# Altium PCB RobotBoardPcb.PcbDoc (part 2 of 2)
Units mm, origin at the board's own origin, x right, y up, seen from the top; angles counter-clockwise.
Board outline 64 x 85 mm, 4 copper layers (Top Layer, Ground Plane, Power Plane, Bottom Layer), stack 0.844 mm thick; 128 components, 94 nets, 395 pads, 170 vias.
Unrouted connection lines stored in the file: 5.
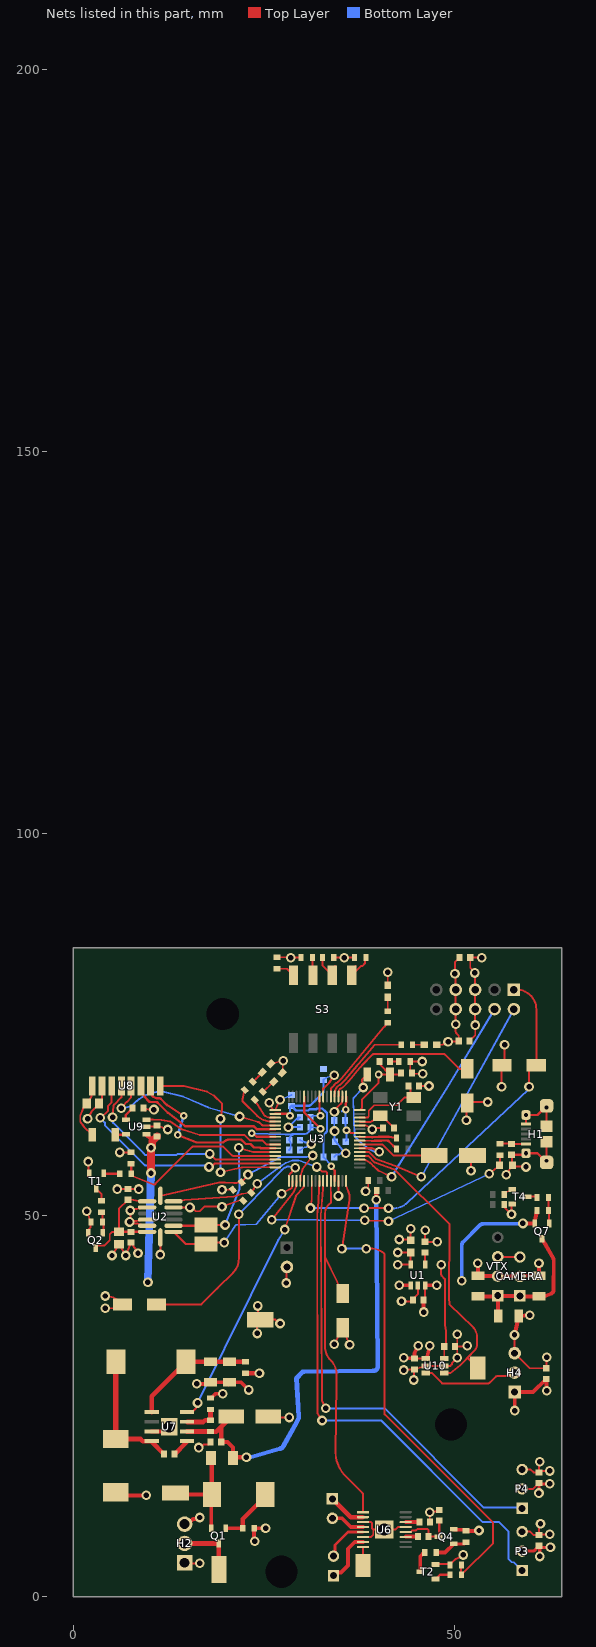
[diagram p4: the nets of this part, all layers, seen from the top]

## Via types
v1: diameter 1.27, hole 0.711, Top Layer to Bottom Layer, 158 vias
v2: diameter 1, hole 0.5, Top Layer to Bottom Layer, 10 vias
v3: diameter 2, hole 1.5, Top Layer to Bottom Layer, 1 vias
v4: diameter 2.2, hole 1.6, Top Layer to Bottom Layer, 1 vias

## Nets (pads, with @x,y where several pads share a name; then routed paths per layer and width w, separated by ;. In a path a pad name is that pad's centre, name@x,y a point inside that pad or via, vN(x,y) a via of type N, cw(c..) or ccw(c..) an arc to the next point about the centre after c; other vN are vias at no path point) (continued)
GND: ?.5 ?.6 C1.1 C2.1 C3.1 C4.1 C5.1 C6.2 C7.2 C8.2 C9.2 C10.2 C11.2 C12.1 C13.1 C14.2 C16.1 C17.1 C18.1 C20.2 C21.1 C22.2 C24.1 C25.2 C26.2 C27.1 C28.2 C29.1 C30.1 C34.1 C35.2 C40.1 C42.1 C43.1 C44.1 C50.1 C51.1 C52.1 C53.1 C55.1 CAMERA.2 D2.1 GND.1 H1.5 H1.6 H2.1 H2.3 H3.2 H4.3 P3.3 P4.3 R7.2 R10.1 R11.1 R12.1 R13.1 R14.2 R16.1 R24.2 R26.2 R34.2 R51.2 R60.2 S1.1 S2.1 S4.1 S5.1 T1.2 T2.2 T4.2 U1.2 U2.2 U2.4 U2.5 U3.2 U3.17 U3.46 U3.60 U6.3 U6.6 U6.13 U6.17 U7.7 U7.EPAD U8.2 U9.2 U10.2 U10.5 VTX.2 | length 240.9
  Top Layer w0.254: v1(1.9,62.6) 2.492,63.622 2.59,63.727 2.977,64.145 C27.1@3.4,64.6 3.4,64.7 3.8,65.1 3.8,66.886 U8.2@3.786,66.9 ; v1(2,57) 2,55.83 T1.2@2.097,55.457 ; v1(4.2,37.8) 5.243,37.8 ccw(c5.243,39.507) S5.1@6.45,38.3 6.094,38.656 ccw(c4.298,36.86) 4.298,39.4 v1(4.2,39.4) ; v1(5.1,44.7) 5.541,45.436 C17.1@6,46.2 6.459,45.436 v1(6.9,44.7) 7.34,45.769 C18.1@7.6,46.4 7.977,45.787 8.5,45.264 v1(8.5,45) ; D2.1@5.6,13.725 D2.1@7.123,13.3 ; v1(5.8,53.4) 6.5,53.4 C16.1@7.2,53.4 ; v1(6.1,58.2) R24.2@7.6,58.2 ; C16.1@7.29,53.255 7.523,53.4 v1(8.6,53.4) ; v1@7.5,49.202 v1(7.5,50.6) 7.694,50.794 8.3,50.794 8.306,50.801 U2.2@9.7,51 U2.2@8.724,51 ; U2.4@8.724,49.4 U2.4@9.7,49.4 8.306,49.201 7.501,49.201 v1(7.4,49.1) 7.593,48.907 8.41,48.907 U2.5@9.7,48.6 ; C42.1@9.473,63.677 C42.1@9.2,64 9.84,63.817 10.584,63.817 v1(10.587,63.814) ; U9.2@9.6,61.55 9.65,61.6 10.9,61.6 C28.2@11,61.7 11.689,61.488 11.783,61.394 12.206,61.394 v1(12.4,61.2) ; U7.EPAD@11.965,21.665 v3(12.6,22.3) ; H2.1@14.6,4.46 14.66,4.4 v1(16.6,4.4) ; H2.3@14.6,9.54 H2.3@15.059,9.54 ; v1@16.406,10.206 v1(16.6,10.4) ; v1(16.447,19.556) 16.722,19.556 17.143,19.977 17.727,19.977 18,20.25 C22.2@18,20.3 ; C25.2@17.8,27.9 C25.2@18,28.1 ; C26.2@20.377,27.677 C26.2@20.5,28.1 ; v1@23.7,7.4 v1(23.8,7.3) ; v1(24.1,34.5) 24.1,35.9 GND.1@24.5,36.3 ; v1(24.2,38.1) 24.2,36.6 GND.1@24.5,36.3 ; C24.1@25.55,23.6 27.073,23.5 v1(28.299,23.5) ; v1(25.7,64.7) 26.077,63.886 ccw(c26.307,63.993) 26.325,63.739 U3.17@26.475,63.75 v1(27.1,65.1) ; R13.1@26.7,83.75 28.45,83.75 v1(28.5,83.7) R12.1@29.85,83.7 ; v1(27.1,35.8) 27,35.8 26.5,36.3 GND.1@24.5,36.3 ; v1(27.9,41.1) 27.95,41.15 27.95,43.15 H3.2@28,43.2 ; R11.1@34.15,83.7 R10.1@36.75,83.7 ; v1(34.2,33.1) 34.547,33.777 S2.1@35.3,35.25 35.893,33.768 v1(36.2,33) ; v1(34.218,63.535) 34.2,63.553 34.2,63.7 35.067,64.553 ccw(c34.75,64.875) 35.201,64.843 U3.2@35.25,65.525 ; v1(34.743,52.507) U3.46@34.75,54.475 ; U3.60@37.525,61.75 38.245,61.75 cw(c38.245,61.496) 38.344,61.73 v1@39.091,61.416 ; U6.6@37.95,7.85 39.012,7.85 39.3,8.138 39.3,8.825 ; U6.3@37.95,9.8 39.012,9.8 39.156,9.656 39.156,8.969 39.3,8.825 ; v1(38.3,53.1) 38.3,53.375 38.65,53.725 R16.1@38.65,54.5 ; v1(39.159,61.206) 39.159,61.191 39.162,61.189 39.176,61.175 39.2,61.2 39.2,61.4 C13.1@40.6,61.4 ; v1(42.7,46.8) 44.1,46.8 C11.2@44.2,46.7 v1(44.2,48.2) ; v1(43,38.7) 44.127,38.7 44.4,38.9 45.15,39.65 U1.2@45.15,40.8 ; v1(43.3,29.7) 44.001,29.75 C30.1@44.7,29.8 ; U6.13@43.55,9.15 43.541,9.141 42.516,9.141 42.2,8.825 v4(40.75,8.825) 39.3,8.825 ; C14.2@44.354,68.5 v1(45.8,68.5) ; C14.2@44.354,68.6 44.15,68.804 R7.2@44.15,70.1 v1(45.7,70.1) ; v1(44.6,28.4) 44.654,29.151 C30.1@44.7,29.8 ; C12.1@45.3,66.9 45.573,66.9 v1(46.6,66.9) ; v1(46.1,48) C40.1@46.1,46.5 v1(47.7,46.5) ; C20.2@46.75,9.8 46.7,10.123 v1(46.7,11.1) 46.871,11.159 cw(c46.954,10.919) 46.954,11.173 47.627,11.173 C21.1@47.95,11.4 ; R26.2@49.35,4.2 50.068,4.918 cw(c50.249,4.739) 50.126,4.962 v1(51.1,5.5) ; v1(50.3,34.4) 50.3,33.1 C29.1@50,32.8 ; v1(51.5,62.4) 51.5,64.55 S4.1@51.6,64.65 51.75,64.8 v1(54.3,64.8) ; v1(51.6,32.9) 51.5,32.8 C29.1@50,32.8 ; C50.1@51.9,72.8 52.66,73.56 v1(52.66,74.877) 52.64,74.897 ?.6@52.64,76.96 ?.5@52.64,79.5 52.62,79.52 52.62,81.68 v1(52.6,81.7) 52.6,81.752 52,82.352 C51.1@52,83.7 v1(53.5,83.7) ; C35.2@52.95,42 C35.2@53,42.05 C35.2@53.05,42 ; VTX.2@55.6,42 VTX.2@55.62,41.98 ; v1(56.1,66.8) 56.1,69.55 cw(c56.15,69.55) S1.1@56.15,69.6 ccw(c56.15,69.95) 56.5,69.95 v1(56.5,72.3) ; R51.2@56.45,51.4 56.45,51.05 v1(57.4,50.1) 57.4,51.35 T4.2@57.5,51.45 ; v1(56.714,55.275) 57.227,56.127 R60.2@57.55,56.5 ; C44.1@57.4,57.9 57.469,57.251 57.47,57.249 R60.2@57.55,56.5 ; v1(57.8,34.3) 57.809,32.021 ccw(c58.063,32.023) 57.81,32 H4.3@57.818,31.908 59.787,29.939 C55.1@61.951,29.939 62,30.212 v1(62,31.4) ; CAMERA.2@58.48,41.98 CAMERA.2@58.5,41.96 CAMERA.2@58.59,42.05 ; P3.3@58.8,8.54 59.86,8.54 60.3,8.1 C52.1@61,8.1 61.1,8.2 v1(62.4,8.2) ; P4.3@58.8,16.68 59.92,16.68 60.3,16.3 C53.1@61,16.3 ; 59.149,36.855 v1(59.8,36.9) ; v1(59.3,56.3) 58.7,56.369 ccw(c58.671,56.116) 58.671,56.37 57.873,56.37 R60.2@57.55,56.5 ; H1.5@59.3,61.9 H1.6@59.3,63.1 ; C52.1@61,8.2 61,9.125 61.2,9.325 v1(61.2,9.6) ; C34.1@61,42.05 C34.1@61.15,41.9 ; v1(61.1,17.7) 61,17.6 C53.1@61,16.3 ; v1(62.4,16.5) 61.2,16.5 C53.1@61,16.3 ; C30.1@44.7,29.8 45.389,30.007 45.411,30.013 U10.2@46.2,30.25 U10.5@48.6,30.25 49.4,30.25 49.609,30.459 49.609,30.609 v1(50.3,31.3) 50.3,32.5 C29.1@50,32.8
  Top Layer w0.3: T2.2@47.45,4.246 47.496,4.246 47.55,4.3 49.25,4.3 R26.2@49.35,4.2 ; C44.1@57.4,57.9 59.1,57.9 H1.6@59.3,58.1 60.8,58.1 61.8,57.1 H1.6@62,57.1 H1.6@62,59.6 ; H1.6@59.3,63.1 60.8,63.1 61.8,64.1 H1.6@62,64.1 H1.6@62,61.6
  Top Layer w0.5: D2.1@7.123,13.3 v1(9.6,13.3) ; U7.7@10.289,21.665 U7.EPAD@11.965,21.665 ; H2.3@15.059,9.54 15.725,10.206 v1@16.406,10.206 ; v1(16.2,27.9) C25.2@17.8,27.9 ; R34.2@18,26.05 18.1,26.15 18.2,26.15 18.65,26.6 v1(19.6,26.6) ; C25.2@18,28.1 C26.2@20.5,28.1 22,28.1 v1(23,27.1) ; v1@23.7,7.4 R14.2@23.7,9 v1(25.2,9) ; C35.2@53,42.05 v1(53,43.7) ; C35.2@53.05,42 VTX.2@55.6,42 ; VTX.2@55.62,41.98 CAMERA.2@58.48,41.98 ; v1(57.8,34.3) 58.109,35.706 C43.1@58.35,36.8 59.149,36.855 ; CAMERA.2@58.59,42.05 C34.1@61,42.05 v1(61,43.7)
  Bottom Layer w0.254: v1(27.1,65.1) 27.918,65.427 C2.1@28.6,65.7 ; C6.2@29.427,62.477 C6.2@29.7,62.8 29.5,62.8 v1(28.2,61.5) C7.2@29.7,61.5 ; C9.2@29.7,58.5 30.313,58.877 30.502,58.877 30.925,59.3 v1(31.2,59.3) 31.006,59.494 30.395,59.494 30.333,59.556 C8.2@29.7,59.8 ; C3.1@34.2,57.6 34.2,57.65 34.473,57.923 34.848,57.923 35.225,58.3 v1@35.5,58.3 ; v1@34.2,61 C5.1@34.2,62.4 34.218,62.723 v1(34.218,63.535) ; v1(34.235,61) 34.235,59.923 34.3,59.7 34.573,59.377 35.262,58.578 35.7,58.14 v1(35.7,58.1)
  other v1: 35.5,83.7
"H-BRIDGE FAULT": "H-BRIDGE FAULT.1" U6.8 | length 2.4
  Top Layer w0.3: 37.95,4.1 U6.8@37.95,6.55
H-BRIDGE-ENABLE: R25.1 R26.1 U3.48 | length 65.7
  Top Layer w0.254: v1(35.2,45.6) 36.182,52.021 ccw(c35.931,52.06) 36.183,52.028 ccw(c34.173,52.287) 36.063,53.017 ; U3.48@35.75,54.475 35.75,53.878 ccw(c36.004,53.878) 35.767,53.787 36.063,53.018 ; v1(38.4,45.6) 38.66,45.627 cw(c38.94,42.903) 40.7,45 cw(c40.517,44.784) 40.8,44.784 40.8,23.9 55,9.7 55,7.05 R25.1@50.85,2.9 50.8,2.95 50.8,4.15 R26.1@50.85,4.2
  Bottom Layer w0.254: v1(35.2,45.6) v1(38.4,45.6)
I2C_SCL: R8.1 U2.14 U3.36 | length 25.1
  Top Layer w0.254: U2.14@11.425,52.525 11.952,52.612 19.102,54.262 19.898,54.262 21.04,54.215 21.301,54.175 21.427,54.175 R8.1@22.075,54.282 22.457,54.753 v1(22.9,55.3) ; U3.36@29.75,54.475 29.799,55.157 cw(c30.25,55.125) 29.817,55.256 30.021,55.928 ccw(c29.1,56.207) 30.034,55.978 cw(c30.281,55.918) 30.08,56.073 v1(31.4,57.8)
  Bottom Layer w0.254: v1(22.9,55.3) 27.164,57.6 28.432,57.609 28.513,57.623 30.535,57.623 v1(31.4,57.8)
I2C_SDA: R9.1 U2.13 U3.43 | length 23.3
  Top Layer w0.254: U2.13@13.15,51.8 14.567,51.957 21.066,52.421 22.064,52.762 22.636,52.853 R9.1@23.33,52.93 23.664,53.438 v1(24.1,54.1) ; v1(31.9,56.3) 31.961,56.3 32.556,55.705 33.056,55.705 33.25,55.51 U3.43@33.25,54.475
  Bottom Layer w0.254: v1(24.1,54.1) 27.269,56.45 cw(c28.654,54.583) 27.389,56.534 27.787,56.792 28.702,57.169 29.498,57.169 v1(31.9,56.3)
"IMU ENABLE": R23.1 R24.1 U3.29 | length 23.5
  Top Layer w0.254: R23.1@7.6,55.4 7.823,55.077 10.508,54.018 ccw(c10.602,54.254) 10.781,54.074 15.632,58.926 cw(c15.812,58.746) 15.812,59 19.495,59 cw(c19.495,58.746) 19.675,58.925 20.776,57.824 ccw(c20.955,58.004) 20.955,57.75 U3.29@26.475,57.75 ; R24.1@7.6,56.7 R24.1@7.923,56.9
  Top Layer w0.3: R23.1@7.6,55.4 R24.1@7.6,56.7
"IMU INT1": INT1.1 U2.8 U3.34 | length 20.4
  Top Layer w0.254: INT1.1@17.4,46.2 18.773,46.4 v1(19.8,46.4) ; v1(27.3,52.8) 28.394,53.394 cw(c28.516,53.171) 28.419,53.406 ; 28.42,53.406 ccw(c28.25,53.825) 28.701,53.793 U3.34@28.75,54.475
  Top Layer w0.3: U2.8@13.15,47.8 14.75,46.2 INT1.1@17.4,46.2
  Bottom Layer w0.254: v1(19.8,46.4) 21.228,48.59 21.321,48.683 23.985,48.795 v1(27.3,52.8)
"IMU INT2": INT2.1 U2.9 U3.28 | length 22.6
  Top Layer w0.254: INT2.1@17.4,48.7 v1(19.9,48.7) ; v1(21.7,58.8) 23.567,58.28 cw(c23.5,58.035) 23.597,58.269 ccw(c23.694,58.504) 23.694,58.25 U3.28@26.475,58.25
  Top Layer w0.3: U2.9@13.15,48.6 17.3,48.6 INT2.1@17.4,48.7
  Bottom Layer w0.254: v1@20.257,49.057 v1(19.9,48.7) 21.798,53.398 21.799,53.452 v1(21.7,58.8)
LED_strip: H4.2 U10.3 | length 12.7
  Top Layer w0.254: U10.3@46.2,29.3 47,29.3 48.327,27.973 54.368,27.973 ccw(c54.368,28.227) 54.547,28.047 55.326,28.826 cw(c55.505,28.646) 55.505,28.9 57.245,28.9 ccw(c57.245,29.154) 57.424,28.974 H4.2@57.818,29.368
LED_Strip_Leveled: LED.1 U3.52 U10.4 | length 40.3
  Top Layer w0.254: U3.52@37.525,57.75 38.629,57.75 39.504,56.875 42.098,55.962 49.3,48.8 49.249,39.032 49.26,38.431 ccw(c49.514,38.436) 49.338,38.253 52.332,35.368 cw(c52.156,35.184) 52.335,35.365 52.336,35.364 cw(c50.969,34) 52.9,34 52.9,33.024 cw(c51.876,33.024) 52.6,32.3 51.642,31.299 ; U10.4@48.6,29.3 49.4,29.3 50.698,30.338 51.262,30.902 51.642,31.299 ; LED.1@53,30 51.819,31.13 51.642,31.299
MISO: U3.27 U8.7 | length 22.5
  Top Layer w0.3: U8.7@10.143,66.9 10.3,65.8 10.311,65.724 ccw(c10.608,65.767) 10.477,65.497 10.812,65.335 ccw(c10.964,65.65) 10.964,65.3 11.276,65.3 cw(c11.276,65) 11.487,65.213 ; 11.488,65.212 12.247,64.453 ccw(c12.46,64.664) 12.314,64.402 ; 12.314,64.402 cw(c12.167,64.14) 12.33,64.392 v2(14.5,63) ; v2(13.7,60.5) 16.087,59.522 ccw(c16.2,59.8) 16.2,59.5 19.539,59.5 ccw(c19.538,59.8) 19.732,59.572 cw(c20.624,58.524) 20.624,59.9 21.869,59.9 cw(c21.869,59.6) 22.081,59.812 22.597,59.296 23.225,59.296 23.684,58.838 24.462,58.838 ccw(c24.674,59.05) 24.674,58.75 U3.27@26.475,58.75
  Bottom Layer w0.3: v2(13.7,60.5) v2(14.5,63)
MOSI: U3.22 U8.6 | length 20.3
  Top Layer w0.3: U8.6@8.871,66.9 9.111,65.8 ccw(c9.378,65.937) 9.15,65.742 9.859,64.924 ccw(c10.085,65.12) 9.873,64.908 ccw(c10.085,65.12) 10.073,64.82 10.568,64.801 10.889,64.789 cw(c10.879,64.49) 10.891,64.789 cw(c10.879,64.49) 11.09,64.703 11.091,64.702 12.4,63.4 14.083,62.091 14.689,61.61 23.692,61.61 24.052,61.25 U3.22@26.475,61.25
NetC6_1: C6.1 C7.1 C8.1 C9.1 L1.1 U3.8 U3.12 U3.24 U3.54 | length 41.4
  Top Layer w0.254: v1(38,66.7) 37.828,67.569 cw(c38.077,67.618) 37.823,67.618 37.823,67.723 L1.1@38.5,68.4
  Top Layer w0.3: v2(23.4,60.7) 23.561,60.7 24.011,60.25 U3.24@26.475,60.25 ; U3.12@30.25,65.525 30.25,63.45 v2(32.4,61.3) ; U3.8@32.25,65.525 32.25,64.925 32.275,64.9 32.275,63.125 v2(32.4,63) ; U3.54@37.525,58.75 39.126,58.75 39.151,58.725 39.274,58.725 v1(40.091,58.291)
  Bottom Layer w0.254: v2(23.4,60.7) 27.802,60.538 28.598,60.538 28.691,60.631 28.858,60.631 29.1,60.6 ; C9.1@28.3,58.5 28.5,58.823 28.5,59.477 C8.1@28.3,59.8 cw(c29.1,59.8) 29.1,60.6 ; v2(32.4,61.3) 31.373,61.496 C7.1@31.1,61.5 ; v2(32.4,63) 31.373,63 C6.1@31.1,62.8 C7.1@31.1,61.5 ; v1(38,66.7) 36.755,65.368 ccw(c36.941,65.195) 36.687,65.187 36.847,60.46 ccw(c37.1,60.47) 36.902,60.312 ccw(c42.509,64.795) 39.533,58.262 ccw(c39.638,58.493) 39.668,58.241 v1(40.091,58.291) ; 29.1,60.6 30.2,60.6 ccw(c30.2,61.5) C7.1@31.1,61.5
NetC12_2: C12.2 U3.62 Y1.1 | length 10.4
  Top Layer w0.254: U3.62@37.525,62.75 38.55,62.75 38.715,62.915 38.715,63.628 39.461,64.373 42.373,64.373 43.4,65.4 Y1.1@44.6,65.4 44.2,65.8 44.2,66.6 C12.2@43.9,66.9
NetC13_2: C13.2 U3.61 Y1.3 | length 5.4
  Top Layer w0.254: U3.61@37.525,62.25 ccw(c37.671,62.458) 37.671,62.204 38.894,62.204 ccw(c38.894,62.458) 38.958,62.212 ccw(c38.686,63.233) 39.29,62.366 39.377,62.427 Y1.3@40.2,63 40.4,63 C13.2@42,61.4
NetC14_1: C14.1 C15.1 L1.2 U3.64 | length 11
  Top Layer w0.254: U3.64@37.525,63.75 37.837,64.062 37.837,65.15 40,67.312 v2(40,68.4) ; L1.2@41.5,68.4 42.754,68.4 C14.1@42.954,68.6
  Top Layer w0.3: v2(40,68.4) L1.2@41.5,68.4 40.1,69.8 C15.1@40.1,70.1
NetC15_2: C15.2 R7.1 | length 1.2
  Top Layer w0.254: C15.2@41.5,70.1 R7.1@42.65,70.1
NetC16_2: C16.2 C17.2 C18.2 Q2.3 U2.1 U2.6 | length 15.4
  Top Layer w0.254: Q2.3@2.944,45.688 2.944,45.827 3.117,46 4.1,46 4.8,46.7 4.8,47.5 5.1,47.8 C17.2@6,47.8 6,50.8 C16.2@7.2,52 7.899,51.944 8.264,51.915 U2.1@9.7,51.8
  Top Layer w0.3: C17.2@6,47.8 C18.2@7.6,47.8 U2.6@9.7,47.8
NetC19_1: C19.1 U6.11 | length 1.7
  Top Layer w0.254: U6.11@43.55,7.85 U6.11@43.6,7.9 ; C19.1@44.95,7.9 C19.1@45.05,7.8
  Top Layer w0.3: C19.1@45.05,7.8 C19.1@45.15,7.9
  Top Layer w0.5: U6.11@43.6,7.9 C19.1@44.95,7.9
NetC19_2: C19.2 C21.2 Q4.3 U6.12 | length 7.5
  Top Layer w0.254: U6.12@43.55,8.5 44.199,8.5 44.399,8.7 44.9,8.7 45.1,8.9 46.4,8.9 46.55,8.75 C19.2@46.55,7.9
  Top Layer w0.3: C19.2@46.55,7.9 Q4.3@47.85,7.9 47.95,8 C21.2@47.95,10
NetC20_1: C20.1 U6.14 | length 1.8
  Top Layer w0.5: U6.14@43.55,9.8 C20.1@45.35,9.8
NetC23_1: C23.1 U7.1 | length 2.4
  Top Layer w0.254: U7.1@14.852,20.252 ccw(c14.71,20.395) U7.1@14.911,20.395
  Top Layer w0.6: C23.1@13.3,18.7 U7.1@14.852,20.252
NetC23_2: C23.2 D2.2 L2.1 U7.8 | length 17.3
  Top Layer w0.254: U7.8@10.289,20.395 ccw(c10.49,20.395) U7.8@10.348,20.252
  Top Layer w0.3: U7.8@10.284,20.4 U7.8@10.289,20.395
  Top Layer w0.6: D2.2@5.6,20.675 8.825,20.675 9.1,20.4 U7.8@10.284,20.4 ; U7.8@10.348,20.252 C23.2@11.9,18.7
  Top Layer w0.75: D2.2@5.6,20.675 L2.1@5.6,30.8
NetC25_1: C25.1 C26.1 L2.2 R30.1 U7.5 | length 16.3
  Top Layer w0.6: U7.5@10.289,24.205 10.289,26.289 L2.2@14.8,30.8 C25.1@18,30.8 C26.1@20.5,30.8 R30.1@22.6,30.8
NetC27_2: C27.2 L3.1 U8.1 | length 7.6
  Top Layer w0.254: L3.1@2.5,60.5 1.425,61.575 0.938,62.202 0.938,62.998 1.377,64.077 C27.2@1.8,64.6 ccw(c0.076,66.324) 2.514,66.324 U8.1@2.514,66.9
  Top Layer w0.3: U8.1@2.4,66.786 U8.1@2.514,66.9
NetC34_2: C34.2 C35.1 C43.2 CAMERA.1 Q7.3 VTX.1 | length 20.3
  Top Layer w0.254: VTX.1@55.4,39.26 55.49,39.35 VTX.1@55.6,39.46 ; VTX.1@55.629,38.837 VTX.1@55.6,39.46 ; VTX.1@55.64,39.42 VTX.1@55.6,39.46 ; CAMERA.1@58.5,39.42 CAMERA.1@58.57,39.35 ; C34.2@61,39.35 C34.2@61.723,39.36 ; 62.914,44.222 cw(c62.693,44.097) 62.947,44.094
  Top Layer w0.5: C35.1@53,39.35 VTX.1@55.49,39.35 ; VTX.1@55.629,38.837 55.629,37.9 C43.2@55.65,36.8 ; VTX.1@55.64,39.42 CAMERA.1@58.5,39.42 ; CAMERA.1@58.57,39.35 C34.2@61,39.35 ; Q7.3@61.4,46.9 61.806,46.182 62.914,44.222 ; C34.2@61.723,39.36 62.599,39.7 ccw(c62.428,40.137) 62.898,40.132 62.947,44.094
NetC40_2: C40.2 U1.4 | length 1.6
  Top Layer w0.254: U1.4@46.1,43.5 C40.2@46.1,45.1
NetC42_2: C42.2 U9.4 | length 1.9
  Top Layer w0.3: U9.4@6.9,62.5 6.9,63.1 C42.2@7.8,64
NetCAMERA_3: CAMERA.3 VTX.3 | length 3
  Top Layer w0.254: VTX.3@55.63,44.57 VTX.3@55.6,44.54 55.62,44.52 58.48,44.52 CAMERA.3@58.5,44.5
NetD1_1: D1.1 Q1.1 R14.1 | length 7.8
  Top Layer w0.254: D1.1@25.15,13.15 D1.1@25.15,13.4
  Top Layer w0.5: Q1.1@20,9 R14.1@22.2,9
  Top Layer w0.6: R14.1@22.2,9 22.2,10.2 D1.1@25.15,13.15
NetD1_2: D1.2 F1.1 Q1.2 TP11.1 | length 14.2
  Top Layer w0.3: TP11.1@13.4,13.6 TP11.1@13.6,13.4 ; F1.1@18.05,18.2 F1.1@18.15,18.1 ; D1.2@18.1,13.3 D1.2@18.15,13.35 ; D1.2@18.15,13.4 D1.2@18.15,13.35 ; D1.2@18.2,13.4 D1.2@18.15,13.35
  Top Layer w0.5: TP11.1@13.6,13.4 D1.2@18.15,13.4 ; Q1.2@18.1,9 D1.2@18.1,13.3
  Top Layer w0.6: D1.2@18.15,13.4 F1.1@18.15,18.1
NetDL1_1: DL1.1 R17.1 | length 1.6
  Top Layer w0.254: R17.1@44.45,72.3 DL1.1@46,72.3
NetDL2_1: DL2.1 R18.1 | length 2
  Top Layer w0.254: R18.1@24.83,66.13 25.27,66.539 25.719,66.958 DL2.1@26.269,67.469
NetDL3_1: DL3.1 R19.1 | length 1.8
  Top Layer w0.254: R19.1@23.53,67.43 23.955,67.855 24.238,68.138 DL3.1@24.769,68.669
NetDL4_1: DL4.1 R20.1 | length 1.8
  Top Layer w0.254: R20.1@41.2,76.7 DL4.1@41.2,78.5
NetERASE_1: ERASE.1 U3.55 | length 10.4
  Top Layer w0.254: U3.55@37.525,59.25 39.137,59.227 cw(c39.126,58.45) 39.149,59.227 39.551,59.215 39.654,59.215 39.692,59.253 40.489,59.253 40.564,59.178 41.935,57.806 47.294,57.806 ERASE.1@47.3,57.8
NetH2_2: H2.2 Q1.3 TP10.1 | length 7.9
  Top Layer w0.3: TP10.1@19.05,3.65 TP10.1@19.1,3.6
  Top Layer w0.6: H2.2@14.6,7 Q1.3@19.05,7 TP10.1@19.05,3.65
NetL3_2: L3.2 U9.5 | length 1.4
  Top Layer w0.3: L3.2@5.5,60.5 6.8,60.5 U9.5@6.9,60.6
"NetLeft Motor_1": "Left Motor.1" U6.7 | length 7
  Top Layer w0.254: 34.1,2.8 34.482,3.182
  Top Layer w0.5: 34.482,3.182 35.082,3.182 36,4.1 36,6.312 36.888,7.2 U6.7@37.95,7.2
"NetLeft Motor_2": "Left Motor.2" U6.5 | length 5.9
  Top Layer w0.3: 34.1,5.34 34.3,5.54
  Top Layer w0.4: 34.3,5.54 34.3,6.8 36,8.5 U6.5@37.95,8.5
NetQ2_1: Q2.1 R21.2 R22.1 | length 2.8
  Top Layer w0.254: R22.1@3.715,50.357 3.847,50.225 R21.2@3.847,49.096 4,48.943 4,47.794 Q2.1@3.894,47.688
NetQ4_1: Q4.1 R27.1 R28.2 | length 4.5
  Top Layer w0.254: R28.2@51.25,6.95 R28.2@51.45,7.15
  Top Layer w0.4: Q4.1@49.85,6.95 R28.2@51.25,6.95
  Top Layer w0.5: R27.1@47.55,5.8 48.7,5.8 Q4.1@49.85,6.95
NetQ7_1: Q7.1 R50.1 R53.2 | length 3.3
  Top Layer w0.254: R53.2@62.15,50.7 62.25,50.8 R50.1@62.25,52.3 ; R53.2@62.25,50.6 62.291,49.9 62.306,49.65 Q7.1@62.35,48.9
NetR1_2: R1.2 U3.57 | length 4.8
  Top Layer w0.3: U3.57@37.525,60.25 cw(c37.525,59.75) 37.539,60.25 39.133,60.204 ccw(c39.162,61.189) 39.168,60.204 39.288,60.23 39.576,60.23 40.003,60.236 ccw(c39.8,61.2) 40.029,60.242 cw(c40.098,59.95) 40.097,60.25 41.254,60.25 cw(c41.254,59.75) 41.314,60.246 cw(c41.278,59.949) 41.319,60.246 42.15,60.135 R1.2@42.35,60.109
NetR2_2: R2.2 U3.56 | length 5.3
  Top Layer w0.3: U3.56@37.525,59.75 39.119,59.705 ccw(c39.162,61.189) 39.186,59.704 39.387,59.708 39.495,59.73 39.783,59.73 40.371,59.73 41.122,59.75 cw(c41.13,59.45) 41.342,59.662 R2.2@42.35,58.654
NetR10_2: R10.2 S3.1 | length 4.5
  Top Layer w0.254: S3.1@36.48,81.4 37.668,82.588 37.838,82.588 38.25,83 R10.2@38.25,83.7 ; S3.1@36.5,81.5 36.5,82.127 36.973,82.6 S3.1@37,82.6
NetR11_2: R11.2 S3.2 | length 4.1
  Top Layer w0.254: R11.2@32.65,83.7 32.65,82.69 S3.2@33.94,81.4 ; S3.2@33.96,81.5 33.96,82.26 S3.2@34.3,82.6
NetR12_2: R12.2 S3.3 | length 2.6
  Top Layer w0.254: R12.2@31.35,83.7 31.35,81.45 S3.3@31.4,81.4 ; S3.3@31.42,81.5 S3.3@31.6,81.68
NetR13_2: R13.2 S3.4 | length 2.6
  Top Layer w0.254: R13.2@26.7,82.25 28.01,82.25 S3.4@28.86,81.4 ; S3.4@28.8,81.58 S3.4@28.88,81.5
NetR22_2: R22.2 T1.3 | length 1.9
  Top Layer w0.254: T1.3@3.047,53.457 3.715,52.789 R22.2@3.715,51.857
NetR23_2: R23.2 T1.1 | length 1.9
  Top Layer w0.3: T1.1@4.15,55.4 R23.2@6.1,55.4
NetR25_2: R25.2 T2.1 | length 2.1
  Top Layer w0.3: T2.1@47.45,2.346 47.496,2.346 48.05,2.9 R25.2@49.35,2.9
NetR27_2: R27.2 T2.3 | length 2.8
  Top Layer w0.3: R27.2@45.95,5.8 R27.2@46.05,5.8
  Top Layer w0.5: T2.3@45.45,3.296 45.45,5.3 R27.2@45.95,5.8
NetR33_2: R33.2 R34.1 U7.3 | length 4.6
  Top Layer w0.254: U7.3@14.911,22.935 U7.3@14.946,22.9
  Top Layer w0.6: U7.3@14.946,22.9 17.05,22.9 17.3,23.15 R33.2@18,23.15
  Top Layer w0.7: R33.2@18,23.15 R34.1@18,24.55
NetR50_2: R50.2 T4.3 | length 1.4
  Top Layer w0.254: T4.3@59.6,52.3 T4.3@59.5,52.4 60.65,52.4 R50.2@60.75,52.3
NetR52_2: R52.2 T4.1 | length 1.3
  Top Layer w0.254: R52.2@56.45,52.7 56.673,52.973 56.693,52.993 cw(c56.872,52.813) 56.784,53.051 57.127,53.177 T4.1@57.5,53.35
"NetRight Motor_1": "Right Motor.1" U6.2 | length 5
  Top Layer w0.6: 33.95,12.84 36.34,10.45 U6.2@37.95,10.45
"NetRight Motor_2": "Right Motor.2" U6.4 | length 4.5
  Top Layer w0.5: 33.95,10.3 35.212,10.3 36.362,9.15 U6.4@37.95,9.15
"New But1": S4.2 U3.3 | length 20.5
  Top Layer w0.254: U3.3@34.75,65.525 ccw(c34.544,65.674) 34.798,65.674 34.798,66.175 cw(c35.25,66.175) 35.067,66.588 ccw(c34.778,67.235) 35.085,66.596 35.3,66.7 36.07,67.525 37.536,69.264 37.626,69.375 37.673,69.435 37.832,69.594 39.216,71.026 cw(c39.395,70.846) 39.395,71.1 48.495,71.1 cw(c48.495,70.846) 48.674,71.026 50.55,69.15 S4.2@51.6,69.15
"New But2": S5.2 U3.33 | length 31.6
  Top Layer w0.254: S5.2@10.95,38.3 16.8,38.3 18.89,40.39 20.956,42.456 ccw(c19.16,44.252) 21.7,44.252 v1(21.7,50.1) ; U3.33@28.25,54.475 ccw(c27.998,54.507) 28.252,54.507 28.252,54.953 cw(c28.506,54.952) 28.259,55.01 28.31,55.228 cw(c28.75,55.125) 28.542,55.526 ccw(c28.425,55.752) 28.679,55.752 28.679,55.753 v1(29.1,56.207)
  Bottom Layer w0.254: v1(21.7,50.1) 22.746,51.178 27.311,55.885 cw(c28.654,54.583) 27.956,56.319 cw(c28.052,56.084) 28.052,56.338 28.262,56.338 v1(29.1,56.207)
nRST: ?.1 S1.2 U3.39 | length 53.3
  Top Layer w0.254: v1(31.088,50.91) 31.25,52.032 ccw(c30.996,52.043) 31.25,52.043 U3.39@31.25,54.475 ; v1(38.1,50.9) v1(41.3,50.9) ; ?.1@57.72,79.5 58.11,79.5 cw(c58.11,76.96) 60.65,76.96 S1.2@60.65,69.6 ccw(c60.65,68.65) 59.7,68.65 v1(59.7,66.8)
  Bottom Layer w0.254: v1(31.088,50.91) 32.027,50.9 32.237,50.9 v1@37.8,50.9 ; v1(41.3,50.9) ccw(c41.836,53.635) 43.733,51.594 59.61,66.381 ccw(c59.436,66.567) 59.69,66.557 v1(59.7,66.8)
PGOOD: U3.37 U7.4 | length 34.5
  Top Layer w0.254: U7.4@14.911,24.205 15.105,24.205 ccw(c15.105,25.4) v1(16.3,25.4) ; v1@27.709,48.104 29.17,52.487 cw(c29.41,52.407) 29.223,52.578 30.083,53.519 ccw(c29.75,53.825) 30.202,53.825 30.202,54.026 cw(c30.456,54.026) 30.204,54.054 U3.37@30.25,54.475
  Bottom Layer w0.254: v1(16.3,25.4) 26.843,46.691 cw(c27.07,46.578) 26.853,46.71 v1(27.7,48.1)
RADIO_OFF: U3.26 U9.3 | length 18.5
  Top Layer w0.254: U9.3@9.6,62.5 10.476,62.5 11.585,62.427 12.706,62.254 14.252,61.211 ccw(c14.394,61.421) 14.319,61.179 16.489,60.511 ccw(c16.563,60.754) 16.563,60.5 22.325,60.5 cw(c22.325,60.246) 22.505,60.426 23.157,59.773 24.8,59.773 25.323,59.25 U3.26@26.475,59.25 U3.26@27.121,59.25
RF_CE: U3.31 U8.3 | length 30.8
  Top Layer w0.254: v1(3.54,62.748) 3.648,62.748 4.579,63.679 4.579,64.292 5.057,64.771 U8.3@5.057,66.9 ; v1(17.8,56.3) 18.075,56.3 18.525,56.75 U3.31@26.475,56.75
  Bottom Layer w0.254: v1(3.54,62.748) 3.54,62.725 4.154,62.111 4.154,61.746 9.326,56.574 ccw(c9.505,56.754) 9.505,56.5 17.495,56.5 cw(c17.495,56.246) 17.674,56.426 v1(17.8,56.3)
RF_CSN: U3.30 U8.4 | length 28.6
  Top Layer w0.254: v1(5.169,62.791) 5.169,62.807 5.167,62.81 5.301,64.289 cw(c5.554,64.266) 5.374,64.446 6.329,65.4 U8.4@6.329,66.9 ; v1(17.9,58) 18.65,57.25 U3.30@26.475,57.25
  Bottom Layer w0.254: v1(5.169,62.791) 5.169,62.236 ccw(c5.423,62.236) 5.243,62.057 9.226,58.074 9.462,57.838 13.535,57.838 13.697,58 v1(17.9,58)
RF_IRQ: U3.32 U8.8 | length 25.4
  Top Layer w0.254: U8.8@11.414,66.9 14.469,66.9 cw(c14.469,66.646) 14.53,66.893 17.479,66.173 cw(c17.419,65.926) 17.545,66.147 18.463,65.624 ; 18.463,65.624 cw(c18.337,65.404) 18.517,65.583 19.426,64.674 cw(c19.246,64.495) 19.5,64.495 19.5,63.919 cw(c19.246,63.919) 19.497,63.881 v1(19.3,62.6) ; v1(19.3,55.6) 22.039,56.242 ccw(c21.98,56.489) 22.041,56.243 cw(c22.103,55.996) 22.098,56.25 22.886,56.262 cw(c22.9,55.3) 22.903,56.262 U3.32@26.475,56.25
  Bottom Layer w0.254: v1@19.154,55.94 ccw(c19.404,55.896) 19.195,55.752 v1(19.3,55.6) v1(19.3,62.6)
Servo1: P4.1 U3.42 | length 61.7
  Top Layer w0.254: U3.42@32.75,54.475 32.745,53.441 32.427,49.929 ccw(c32.68,49.906) 32.426,49.905 32.571,25.768 ccw(c32.825,25.77) 32.6,25.652 v1(33.1,24.7)
  Bottom Layer w0.254: v1(33.1,24.7) 40.8,24.7 53.8,11.7 58.7,11.7 P4.1@58.8,11.6 P4.1@58.177,11.507
Servo2: P3.1 U3.41 | length 68
  Top Layer w0.254: 32.019,50.617 ccw(c32.271,50.583) 32.017,50.599 31.973,49.953 ccw(c32.68,49.906) 31.972,49.904 31.997,24.114 ccw(c32.251,24.115) 32.037,23.978 v1(32.6,23.1) ; 32.019,50.618 32.05,50.844 U3.41@32.25,54.475
  Bottom Layer w0.254: v1(32.6,23.1) 40.346,23.1 53.656,9.79 55.79,9.79 57,8.58 57,5 57.458,4.542 57.719,4.542 P3.1@58.8,3.46
SLEEP: S2.2 U3.44 U6.1 | length 50.6
  Top Layer w0.254: U3.44@33.75,54.475 ccw(c33.993,54.402) 33.739,54.399 33.78,51.745 cw(c33.526,51.741) 33.676,51.536 ccw(c34.649,50.204) 33,50.203 33,50.201 33,44.5 ; S2.2@35.3,39.75 34.586,41.225 33,44.5 ; U6.1@37.95,11.1 37.95,13.445 ccw(c37.696,13.445) 37.876,13.624 35.694,15.806 cw(c38.883,18.996) 34.373,18.907 34.5,28.102 34.5,29.21 ccw(c32.11,29.21) 33.8,30.9 33.744,30.956 cw(c35.54,32.752) 33,32.752 33,44.5
SPCK: U3.21 U8.5 | length 25
  Top Layer w0.254: v1(6.3,64) 6.986,64.785 cw(c7.177,64.618) 6.997,64.797 7.6,65.4 U8.5@7.6,66.9 ; v1(21.8,62.9) 24.153,62.209 ccw(c24.226,62.452) 24.203,62.199 ; 24.203,62.199 cw(c24.181,61.946) 24.268,62.185 24.289,62.177 cw(c24.202,61.938) 24.382,62.118 24.676,61.824 ccw(c24.855,62.004) 24.855,61.75 U3.21@26.475,61.75
  Bottom Layer w0.254: v1(6.3,64) 6.41,64 ccw(c6.41,66.39) 8.1,64.7 cw(c11.682,61.118) 11.649,66.183 cw(c11.651,65.929) 11.713,66.176 14.4,65.5 cw(c14.338,65.254) 14.439,65.487 17.736,64.064 ccw(c17.837,64.297) 17.767,64.053 v1(21.8,62.9)
STAT0: R17.2 U3.4 | length 12.2
  Top Layer w0.254: U3.4@34.25,65.525 34.299,66.207 cw(c34.75,66.175) 34.339,66.364 34.427,66.554 cw(c35.25,66.175) 34.864,66.995 34.887,67.005 ccw(c34.778,67.235) 34.957,67.055 35.616,67.713 37.172,69.542 37.219,69.623 37.378,69.784 39.52,72.3 R17.2@42.95,72.3
STAT1: R18.2 U3.19 | length 3.9
  Top Layer w0.254: R18.2@23.77,65.07 24.147,64.466 25.025,63.076 ccw(c25.845,63.945) 25.845,62.75 U3.19@26.475,62.75
STAT2: R19.2 U3.20 | length 6.8
  Top Layer w0.254: R19.2@22.47,66.37 22.288,65.746 22.171,65.14 22.171,64.929 22.184,64.916 24.106,62.994 ccw(c25.902,64.79) 25.902,62.25 U3.20@26.475,62.25
STAT3: R20.2 U3.5 | length 12.5
  Top Layer w0.254: U3.5@33.75,65.525 33.75,66.56 33.899,66.709 34.058,66.852 ccw(c33.888,67.041) 34.103,66.905 cw(c35.25,66.175) 34.608,67.374 34.632,67.387 ccw(c34.512,67.611) 34.691,67.43 35.162,67.902 40.603,74.503 40.752,74.652 40.778,74.652 R20.2@41.2,75.2
SWCLK: ?.2 U3.53 | length 34
  Top Layer w0.254: U3.53@37.527,58.247 38.774,58.247 39.692,57.329 42.228,56.416 v1(45.6,55)
  Bottom Layer w0.254: v1(45.6,55) ?.2@57.72,76.96
SWDIO: ?.4 U3.51 | length 30.6
  Top Layer w0.254: U3.51@37.525,57.25 38.207,57.201 cw(c38.175,56.75) 38.371,57.157 38.44,57.124 38.827,56.883 39.103,56.634 39.316,56.421 39.449,56.32 39.983,55.836 ccw(c40.154,56.024) 40.043,55.796 ; 40.044,55.795 v1(41.7,55)
  Bottom Layer w0.254: v1(41.7,55) 49.062,66.802 ?.4@55.18,76.96
USB_DETECT: R3.2 R60.1 U3.35 | length 39.1
  Top Layer w0.254: v1(26,49.4) 28.797,52.884 cw(c28.996,52.726) 28.813,52.903 ; 28.814,52.903 ccw(c28.632,53.081) 28.864,52.976 29.162,53.639 ccw(c28.75,53.825) 29.201,53.794 U3.35@29.25,54.475 ; v1(38.2,49.3) v1(41.3,49.2) ; v1(54.5,55.4) 55.206,55.975 R60.1@55.85,56.5 55.878,57.25 R3.2@55.9,57.85
  Bottom Layer w0.254: v1(26,49.4) v1(38.2,49.3) ; v1(41.3,49.2) v1(54.5,55.4)
VBATT: C22.1 C24.2 F1.2 R15.2 R33.1 U7.2 | length 62.5
  Top Layer w0.254: R33.1@17.985,21.665 R33.1@18,21.65 ; R15.2@39.7,53.15 R15.2@39.75,53.2
  Top Layer w0.5: C22.1@19.4,20.3 20.2,20.3 20.95,19.55 F1.2@20.95,18.2
  Top Layer w0.6: U7.2@14.911,21.665 R33.1@17.985,21.665 ; R33.1@18,21.65 18.75,21.65 19.4,22.3 ; C22.1@19.4,20.3 19.4,22.3 ; C24.2@20.7,23.6 19.4,22.3 ; F1.2@20.95,18.2 21.3,18.3 v1(22.7,18.3) ; v1(39.7,52) R15.2@39.7,53.15
  Bottom Layer w0.6: v1(22.7,18.3) ccw(c22.974,18.834) 23.141,18.258 27.162,19.431 ccw(c26.993,20.006) 27.519,19.718 29.294,22.954 ccw(c28.299,23.5) 29.295,22.956 29.465,23.266 ccw(c28.939,23.554) 29.538,23.588 ; 29.538,23.588 29.254,28.619 29.979,29.43 cw(c30.27,28.906) 30.264,29.506 39.252,29.594 ccw(c39.241,30.536) 39.409,29.609 ccw(c39.302,30.199) 39.801,29.866 ccw(c39.302,30.199) 39.902,30.205 v1(39.7,52)
VBUS: C44.2 H1.1 R3.1 | length 3.4
  Top Layer w0.254: R3.1@55.9,59.35 57.35,59.35 C44.2@57.4,59.3
  Top Layer w0.3: C44.2@57.4,59.3 H1.1@59.3,59.3
"VDD 3.3V": "VDD 3.3V.1" ?.7 ?.8 C1.2 C2.2 C3.2 C4.2 C5.2 C11.1 C29.2 C50.2 C51.2 DL1.2 DL2.2 DL3.2 DL4.2 Q2.2 R8.2 R9.2 R21.1 U1.5 U2.7 U2.12 U3.1 U3.7 U3.18 U3.45 U3.58 U10.6 | length 95.6
  Top Layer w0.254: v1(1.8,50.5) 2.062,49.781 2.315,49.084 2.3,49.069 2.3,48.4 1.994,48.094 Q2.2@1.994,47.688 ; v1(11.425,44.825) U2.7@11.425,47.075 ; U2.12@13.15,51 14.075,51 v1(15.3,51) 15.552,51 16.052,50.5 16.6,50.5 17.2,51.1 v1(19.5,51.1) 21.884,51.94 R9.2@22.27,51.87 ; v1(19.5,53.3) 20.223,53.309 R8.2@20.925,53.318 R8.2@20.962,52.927 ; DL3.2@25.9,69.8 26.708,70.002 v1(27.5,70.2) 27.453,69.453 DL2.2@27.4,68.6 ; U3.7@32.75,65.525 32.75,66.56 33.536,67.347 ccw(c33.357,67.527) 33.566,67.382 v1(34.2,68.3) ; v2(35.8,61.1) 36.002,61.1 36.352,60.75 U3.58@37.525,60.75 ; DL4.2@41.2,80.1 41.2,80.473 v1(41.2,81.8) ; v1(42.5,43.5) U1.5@44.2,43.5 C11.1@44.2,45.1 v1(42.5,45.1) ; DL1.2@47.6,72.3 48.425,72.3 48.825,72.7 v1(49.1,72.7) 50.259,72.7 ccw(c50.259,73.041) C50.2@50.5,72.8 50.5,73.5 50.174,73.826 cw(c50.355,74.005) 50.101,74.005 v1(50.1,75) ?.8@50.1,76.96 ?.7@50.1,79.5 50.05,79.55 50.05,81.55 v1(50,81.6) 50,83.1 C51.2@50.6,83.7 ; v1(48.2,43.5) 48.2,42.205 ccw(c48.454,42.205) 48.274,42.026 ; 48.274,42.026 48.626,41.674 cw(c48.446,41.495) 48.7,41.495 48.7,35.605 48.8,34.794 48.8,33 C29.2@48.6,32.8 U10.6@48.6,31.2 ; 51,56.927 52.3,57.8 52.1,56.927 v1(52.1,55.8)
  Top Layer w0.3: U3.18@26.475,63.25 27.961,63.25 28.211,63 v2(28.4,63) ; v2(33.8,56.4) 33.8,56.239 34.25,55.789 U3.45@34.25,54.475 ; v2(35.7,63.8) U3.1@35.75,65.525 ; v2(35.8,61.1) v2@35.934,60.966
  Bottom Layer w0.254: C1.2@32.8,67.7 33.123,67.973 v1(34.2,68.3) ; 33.079,60.777 32.94,60.63 ccw(c33.8,60.2) 32.926,60.602 32.823,60.377 ccw(c33.054,60.272) 32.8,60.272 32.8,57.55 33.8,56.55 v2(33.8,56.4) ; C4.2@35.7,59.7 35.8,59.8 v2(35.8,61.1) 35.658,61.242 35.658,62.077 C5.2@35.6,62.4 35.65,63.099 v2(35.7,63.8)
  Bottom Layer w0.3: v2(28.4,63) 28.4,64.1 C2.2@28.6,64.3 ; C1.2@32.8,67.7 32.8,66.224 cw(c32.5,66.224) 32.713,66.013 31.088,64.388 cw(c30.876,64.6) 30.876,64.3 C2.2@28.6,64.3 ; 33.079,60.777 33.25,60.948 33.25,63.352 33.124,63.479 32.641,63.962 31.936,63.962 31.824,63.85 30.951,63.85 30.801,63.7 29.2,63.7 C2.2@28.6,64.3 ; 35.203,63.587 v2(35.7,63.8)
"VDD 5V": C10.1 C28.1 C30.2 C52.2 C53.2 C55.2 H4.1 P3.2 P4.2 Q4.2 Q7.2 R28.1 R30.2 R53.1 U1.1 U1.3 U9.1 U10.1 | length 76.8
  Top Layer w0.254: 10.2,60 v1(10.2,58.8) v1@10.385,58.985 ; v1(43.3,31.3) 44.001,31.25 ; 44.694,31.856 44.7,31.85 ; C30.2@44.7,31.2 45.4,31.2 U10.1@46.2,31.2 46.378,31.398 46.378,31.454 ccw(c46.124,31.454) U10.1@46.375,31.494 ; C10.1@45.9,38.8 45.8,38.9 46.1,39.2 U1.3@46.1,40.8 ; P4.2@58.8,14.14 60.24,14.14 C53.2@61,14.9 C53.2@61.1,14.8 ; Q7.2@60.391,48.9 Q7.2@60.45,48.9 ; C52.2@61,6.7 61.1,6.6 C52.2@61.2,6.5 ; C55.2@61.951,28.539 C55.2@62,28.49 ; v1@62.306,6.694 v1(62.5,6.5)
  Top Layer w0.4: Q4.2@49.85,8.85 Q4.2@49.9,8.8 ; R28.1@51.3,8.8 R28.1@51.45,8.65 ; P3.2@58.8,6 60.3,6 C52.2@61,6.7 ; v1(61,13.6) C53.2@61,14.9 ; v1(61.1,5.3) C52.2@61.1,6.6 ; C53.2@61.1,14.8 v1(62.4,14.8) ; C52.2@61.2,6.5 v1(62.5,6.5)
  Top Layer w0.5: v1(42.7,40.8) U1.1@44.2,40.8 ; 44.001,31.25 C30.2@44.7,31.2 44.7,31.85 ; 44.694,31.856 v1(45.2,32.9) ; v1(45.9,37.3) C10.1@45.9,38.8 ; U1.3@46.1,40.8 v1(47.6,40.8) ; U10.1@46.375,31.494 v1(46.7,32.9) ; Q4.2@49.9,8.8 R28.1@51.3,8.8 ; R28.1@51.45,8.65 53.1,8.65 v1(53.15,8.7) ; H4.1@57.818,26.828 60.24,26.828 C55.2@61.951,28.539 ; v1(57.825,24.4) H4.1@57.825,26.821 ; v1(58.9,48.9) Q7.2@60.391,48.9 ; Q7.2@60.394,48.912 60.548,49.645 60.603,49.905 R53.1@60.75,50.6 ; v1(62,27) C55.2@62,28.49
  Top Layer w0.6: U9.1@9.6,60.6 10.2,60 ; R30.2@22.6,29.3 v1(24.4,29.3)
  Top Layer w1: v1(10.2,55.5) v1(10.2,58.8) ; v1@10.385,58.985 10.385,59.685 C28.1@11,60.3
  Bottom Layer w0.5: v1(50.9,41.4) 50.9,46.093 cw(c51.4,46.093) 51.046,46.446 53.282,48.682 cw(c53.635,48.328) 53.629,48.828 v1(58.9,48.9)
  Bottom Layer w1: v1(9.8,41.2) v1(10.2,55.5)
pads on no net: ?.3 ?.9 ?.10 H1.4 MT1.1 MT2.1 MT3.1 U2.3 U2.10 U2.11 U3.6 U3.15 U3.40 U3.50 U3.59 U3.63 U7.6 VTX.4 Y1.2 Y1.4

## Polygon pours and split planes (outlines as drawn)
GND on Ground Plane (split plane): 63.49,0.51 0.51,0.51 0.51,68 22.8,68 25.9,71.1 25.9,84.49 63.49,84.49
"VDD 5V" on Power Plane (split plane): 63.49,0.51 0.51,0.51 0.51,42.171 63.49,42.171
"VDD 3.3V" on Power Plane (split plane): 63.49,42.429 0.51,42.429 0.51,68.1 23.2,68.1 26,70.9 26,84.49 63.49,84.49

## Other copper
Ground Plane (plane layer: these items are gaps in the copper):
  pour cut-out: 0.1,84.9 0.1,68.1 0.2,68 22.8,68 25.9,71.1 25.9,85
Power Plane (plane layer: these items are gaps in the copper):
  pour cut-out: 35.5,202.3 35.4,202.2 35.4,185.7 58.6,185.7 61.4,188.5 61.4,202.4
  pour cut-out: 0.1,84.7 0,84.6 0,68.1 23.2,68.1 26,70.9 26,84.8
  lines w0.254: 0,42.3 64.1,42.3

## Silkscreen, mask and mechanical layers (free items; w line width, h text height)
Top Overlay:
  text "nRST" at 58.85,83.45 h0.7
  text "Header 5x2" at 42.4,83.3 h0.5
  text "Radio System (Control)" at 13.717,81.25 h0.5 r270
  text "SWCLK" at 57,72.6 h0.5
  text "SWDIO" at 53,72.5 h0.5
  text "1" at 26.35,70.65 h0.7
  text "nRST" at 63.05,68.25 h0.7 r90
  text "2" at 27.65,67.35 h0.7
  text "BUT1" at 49.15,65.55 h0.7 r90
  text "Micro USB" at 57.85,65.45 h0.6
  text "IMU System" at 12.71,54.71 h0.6
  text "Battery Monitor" at 39.967,45.9 h0.4 r90
  text "CAM" at 51.85,44.65 h0.7
  text "BUT2" at 5.85,40.75 h0.7
  text "BUMP" at 26.85,39.25 h0.7
  text "5V" at 62.05,37.95 h0.7
  text "FPV" at 51.05,37.65 h0.7
  text "Level Shift" at 43.575,34.275 h0.4
  text "LED STRIP" at 58.9,33.7 h0.5
  text "SLEEP" at 34.05,31.35 h0.7
  text "5V" at 25.55,28.95 h0.7
  text "Power System" at 1.783,19.55 h0.8 r90
  text "Servo 1" at 57.5,18.7 h0.5
  text "VBATT" at 24.85,17.45 h0.7
  text "Group04-Robot Board-mdo94, bto38" at 30.354,15.121 h0.8
  text "Servo 2" at 57.3,1.2 h0.5
Board Outline:
  the board outline again, w0.254

## Dimensions
0,86 to 64,86 on Mechanical 1
65,85 to 65,0 on Mechanical 1

## Text inside footprints (layer, text, board x,y; h text height)
H1: Mechanical 1 "PCB Edge" at 64.27,58.45 h0.52 r90
H3: Top Overlay "1" at 30.1,39.3 h1.52
H4: Top Overlay "1" at 61.8,24.1 h1.52
S3: Top Overlay "ID" at 38.6,76.3 h1; Top Overlay "1" at 38.08,82.15 h0.8 r180; Top Overlay "2" at 35.48,82.05 h0.8 r180; Top Overlay "3" at 32.88,82.1 h0.8 r180; Top Overlay "4" at 30.405,82.075 h0.8 r180
U7: Mechanical 13 "*" at 14.53,21.144 h1.27 r180
U8: Top Overlay "NO GND/ / POWER / PLANES / UNDER / OR NEARBY" at 2.614,72.175 h1.2
?: Top Overlay "9" at 46.36,80.25 h1.5 r180; Top Overlay "10" at 46.36,77.71 h1.5 r180; Top Overlay "1" at 59.42,80.25 h1.5 r180; Top Overlay "2" at 60.2,77.8 h1.5 r180